# Altium PCB 52204 Breakout.PcbDoc
Units mil, origin at the board's own origin, x right, y up, seen from the top; angles counter-clockwise.
Board outline 1200 x 2500 mil, 2 copper layers (Top Layer, Bottom Layer); 3 components, 22 nets, 54 pads, 0 vias.
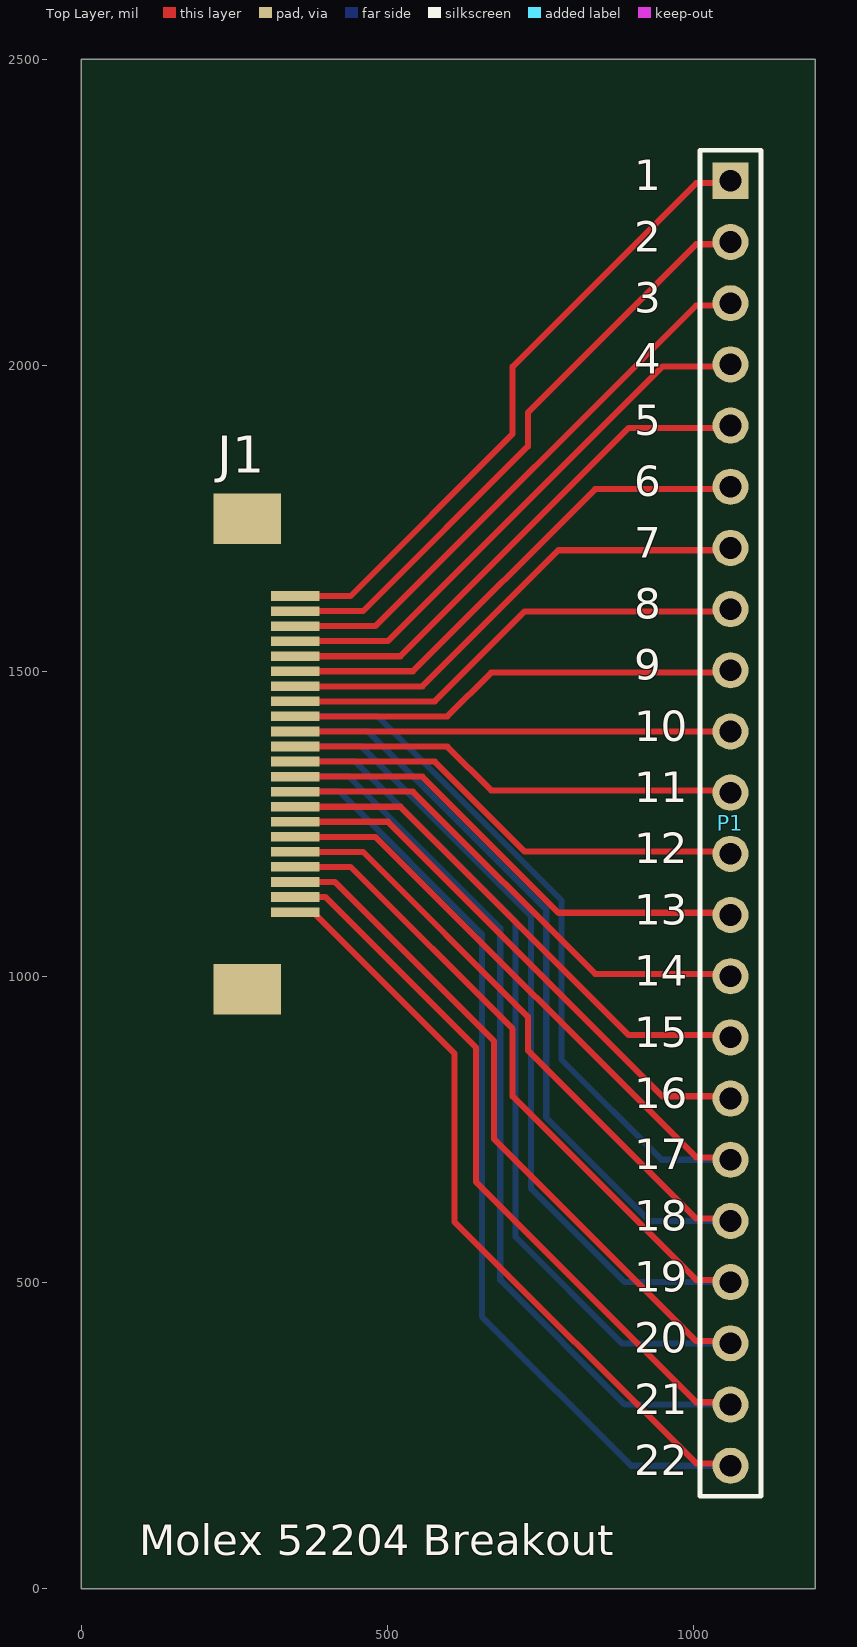
[diagram p0: Top Layer view]
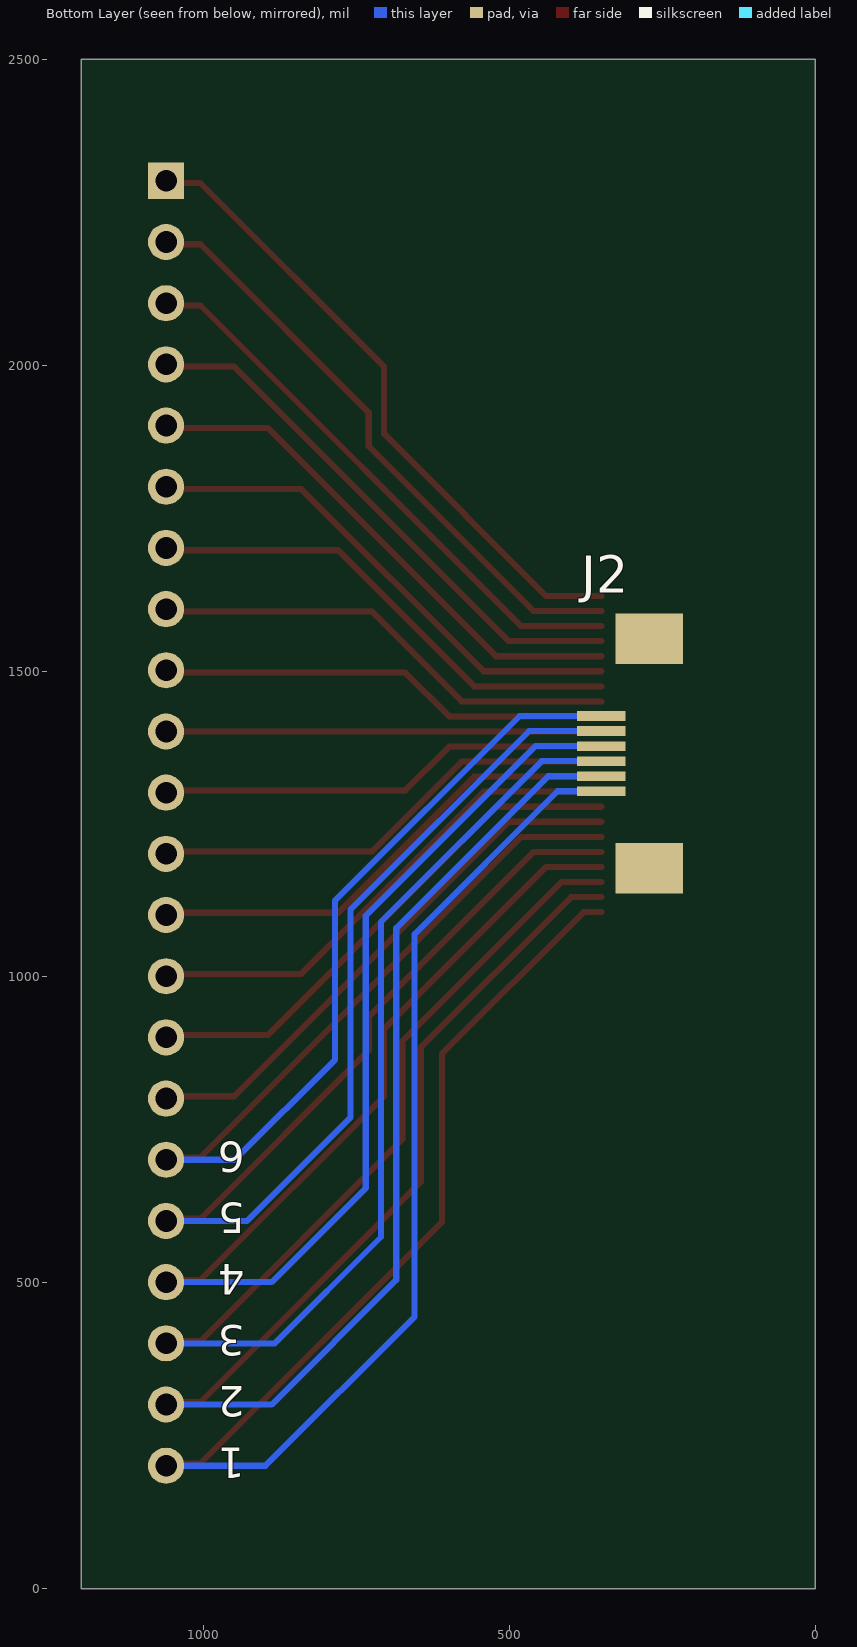
[diagram p1: Bottom Layer view, seen from below]

## Layer stack, top to bottom
Top Solder: solder mask 0.4, Solder Resist, Dk 3.5
Top Layer: signal copper 1.4
Dielectric 1: dielectric 12.6, FR-4, Dk 4.8
Bottom Layer: signal copper 1.4
Bottom Solder: solder mask 0.4, Solder Resist, Dk 3.5

## Board outline
0,0 1200,0 1200,2500 0,2500

## Design rules (kind name [scope] priority, off if disabled: settings)
Clearance [All] p1: gap=6 ignorepadtopadclearanceinfootprint=FALSE except(0: Arc-Hole Track-Hole SMDPad-Hole THPad-Hole Via-Hole Fill-Hole Poly-Hole Region-Hole Text-Hole)
PolygonConnect [All] p1: connectstyle=Relief reliefconductorwidth=10 reliefentries=4 polygonreliefangle="90 Angle" airgapwidth=10
RoomDefinition "52204 Breakout" [InComponentClass('52204 Breakout')] p1: confinementstyle=ConfineIn formatcopy=TRUE lockcomponents=FALSE outline -275,-240 6145,-240 6145,4375 -275,4375
RoutingVias [All] p1: holewidth=28 width=50 viastyle="Through Hole" minholewidth=28 minwidth=50 maxholewidth=28 maxwidth=50
SolderMaskExpansion [All] p1: expansion=4
Width [All] p1: maxlimit=10 minlimit=10 preferedwidth=10
30 further rules are at their usual default settings.

## Components (designator, comment, footprint, x,y, rotation, side; value= is the part's Value field where it differs from the comment)
J1 "52204-2290" 52204-2290 310.63,1364.33 r270 top
J2 "52204-0690" 52204-0690 310.75,1365 r90 bottom
P1 "Header 22" HDR1X22 1061.22,2301.22 r270 top

## Footprints (in the part's own frame and the unit in brackets; to place one, negate y for a bottom-side part, rotate by r counter-clockwise, add the part's x,y. Pads: shape width x height; smd on the part's side, far side on the other; paste and mask are expansions set on the pad)
52204-0690 [mm] "Molex 0.625mm FPC, 6 pin"
  rect 0.4x2 smd: 1(-1.562,1) 2(-0.937,1) 3(-0.312,1) 4(0.312,1) 5(0.937,1) 6(1.562,1)
  rect 2.1x2.8 smd: 7(-4.762,-1) 8(4.762,-1)
52204-2290 [mm] "Molex 0.625mm FPC, 2 pin"
  rect 0.4x2 smd: 1(-6.56,1) 2(-5.935,1) 3(-5.31,1) 4(-4.685,1) 5(-4.06,1) 6(-3.436,1) 7(-2.811,1) 8(-2.186,1) 9(-1.562,1) 10(-0.937,1) 11(-0.312,1) 12(0.312,1) 13(0.937,1) 14(1.562,1) 15(2.187,1) 16(2.812,1) 17(3.437,1) 18(4.062,1) 19(4.686,1) 20(5.311,1) 21(5.936,1) 22(6.56,1)
  rect 2.1x2.8 smd: 23(-9.763,-1) 23(9.763,-1)
HDR1X22 [mm] "Connector; Header; 22 Position"
  rect 1.5x1.5 hole 0.9: 1(0,0)
  round 1.5 hole 0.9: 2(2.54,0) 3(5.08,0) 4(7.62,0) 5(10.16,0) 6(12.7,0) 7(15.24,0) 8(17.78,0) 9(20.32,0) 10(22.86,0) 11(25.4,0) 12(27.94,0) 13(30.48,0) 14(33.02,0) 15(35.56,0) 16(38.1,0) 17(40.64,0) 18(43.18,0) 19(45.72,0) 20(48.26,0) 21(50.8,0) 22(53.34,0)
  silkscreen extent -1.27,-1.27 54.61,1.27

## Part data
P1: "Header, 22-Pin", LatestRevisionDate=17-Jul-2002, LatestRevisionNote="Re-released for DXP Platform.", Publisher="Altium Limited"

## Nets (pads, with @x,y where several pads share a name; then routed paths per layer and width w, separated by ;. In a path a pad name is that pad's centre, name@x,y a point inside that pad or via, vN(x,y) a via of type N, cw(c..) or ccw(c..) an arc to the next point about the centre after c; other vN are vias at no path point)
"Pin 1": J1.1 P1.1 | length 1059
  Top Layer w10: J1.1 440.16,1622.6 705,1887.44 705,1997.44 1005,2297.44 P1.1@1065,2297.44
"Pin 2": J1.2 P1.2 | length 995.5
  Top Layer w10: J1.2 460.59,1598.03 730,1867.44 730,1922.44 1005,2197.44 P1.2@1065,2197.44
"Pin 3": J1.3 P1.3 | length 932.1
  Top Layer w10: J1.3 480.98,1573.43 1005,2097.44 P1.3@1065,2097.44
"Pin 4": J1.4 P1.4 | length 900.8
  Top Layer w10: J1.4 501.38,1548.82 950,1997.44 P1.4@1065,1997.44
"Pin 5": J1.5 P1.5 | length 869.6
  Top Layer w10: J1.5 521.77,1524.21 895,1897.44 P1.5@1065,1897.44
"Pin 6": J1.6 P1.6 | length 838.4
  Top Layer w10: J1.6 542.17,1499.61 840,1797.44 P1.6@1065,1797.44
"Pin 7": J1.7 P1.7 | length 807.1
  Top Layer w10: J1.7 557.56,1475 780,1697.44 P1.7@1065,1697.44
"Pin 8": J1.8 P1.8 | length 775.9
  Top Layer w10: J1.8 577.95,1450.39 725,1597.44 P1.8@1065,1597.44
"Pin 9": J1.9 P1.9 | length 744.7
  Top Layer w10: J1.9 598.39,1425.83 670,1497.44 P1.9@1065,1497.44
"Pin 10": J1.10 P1.10 | length 721.9
  Top Layer w10: J1.10 P1.10 ; P1.10@1065,1397.44 P1.10 ; P1.10@1065,1405 P1.10
"Pin 11": J1.11 P1.11 | length 744.7
  Top Layer w10: J1.11 598.39,1376.61 670,1305 P1.11@1065,1305
"Pin 12": J1.12 P1.12 | length 775.9
  Top Layer w10: J1.12 577.95,1352.05 725,1205 P1.12@1065,1205
"Pin 13": J1.13 P1.13 | length 807.1
  Top Layer w10: J1.13 557.56,1327.44 780,1105 P1.13@1065,1105
"Pin 14": J1.14 P1.14 | length 838.4
  Top Layer w10: J1.14 542.17,1302.83 840,1005 P1.14@1065,1005
"Pin 15": J1.15 P1.15 | length 869.6
  Top Layer w10: J1.15 521.77,1278.23 895,905 P1.15@1065,905
"Pin 16": J1.16 P1.16 | length 900.8
  Top Layer w10: J1.16 501.38,1253.62 950,805 P1.16@1065,805
"Pin 17": J1.17 J2.6 P1.17 | length 2095.9
  Top Layer w10: J1.17 480.98,1229.02 1005,705 P1.17@1065,705
  Bottom Layer w10: J2.6 483.5,1426.5 785,1125 785,865 948.78,701.22 P1.17
"Pin 18": J1.18 J2.5 P1.18 | length 2237.4
  Top Layer w10: J1.18 460.59,1204.41 730,935 730,880 1005,605 P1.18@1065,605
  Bottom Layer w10: J2.5 468.11,1401.89 760,1110 760,770 928.78,601.22 P1.18
"Pin 19": J1.19 J2.4 P1.19 | length 2393.6
  Top Layer w10: J1.19 440.16,1179.84 705,915 705,805 1005,505 P1.19@1065,505
  Bottom Layer w10: J2.4 457.72,1377.28 735,1100 735,655 888.78,501.22 P1.19
"Pin 20": J1.20 J2.3 P1.20 | length 2526.4
  Top Layer w10: J1.20 414.76,1155.24 675,895 675,735 1005,405 P1.20@1065,405
  Bottom Layer w10: J2.3 447.28,1352.72 710,1090 710,575 883.78,401.22 P1.20
"Pin 21": J1.21 J2.2 P1.21 | length 2659.1
  Top Layer w10: J1.21 399.37,1130.63 645,885 645,665 1005,305 P1.21@1065,305
  Bottom Layer w10: J2.2 436.89,1328.11 685,1080 685,505 888.78,301.22 P1.21
"Pin 22": J1.22 J2.1 P1.22 | length 2783.1
  Top Layer w10: J1.22 378.94,1106.06 610,875 610,600 1005,205 P1.22@1065,205
  Bottom Layer w10: J2.1 421.5,1303.5 655,1070 655,445 898.78,201.22 P1.22
pads on no net: J1.23 J2.7 J2.8

## Silkscreen, mask and mechanical layers (free items; w line width, h text height)
Top Overlay:
  text "1" at 903.74,2285.47 h50
  text "2" at 903.74,2185.47 h50
  text "3" at 903.74,2085.47 h50
  text "4" at 903.74,1985.47 h50
  text "5" at 903.74,1885.47 h50
  text "6" at 903.74,1785.47 h50
  text "7" at 903.74,1685.47 h50
  text "8" at 903.74,1585.47 h50
  text "9" at 903.74,1485.47 h50
  text "10" at 903.74,1385.47 h50
  text "11" at 903.74,1285.47 h50
  text "12" at 903.74,1185.47 h50
  text "13" at 903.74,1085.47 h50
  text "14" at 903.74,985.47 h50
  text "15" at 903.74,885.47 h50
  text "16" at 903.74,785.47 h50
  text "17" at 903.74,685.47 h50
  text "18" at 903.74,585.47 h50
  text "19" at 903.74,485.47 h50
  text "20" at 903.74,385.47 h50
  text "21" at 903.74,285.47 h50
  text "22" at 903.74,185.47 h50
  text "Molex 52204 Breakout" at 95,55 h50
Bottom Overlay:
  text "6" at 932.48,730.75 h50 r180
  text "5" at 932.48,630.75 h50 r180
  text "4" at 932.48,530.75 h50 r180
  text "3" at 932.48,430.75 h50 r180
  text "2" at 932.48,330.75 h50 r180
  text "1" at 932.48,230.75 h50 r180
Mechanical 1:
  the board outline again, w10